# Altium PCB ADIO_Ver1.2.PcbDoc (part 1 of 2)
Units mm, origin at the board's own origin, x right, y up, seen from the top; angles counter-clockwise.
Board outline 260 x 90 mm, 2 copper layers (Top Layer, Bottom Layer); 178 components, 134 nets, 625 pads, 141 vias.
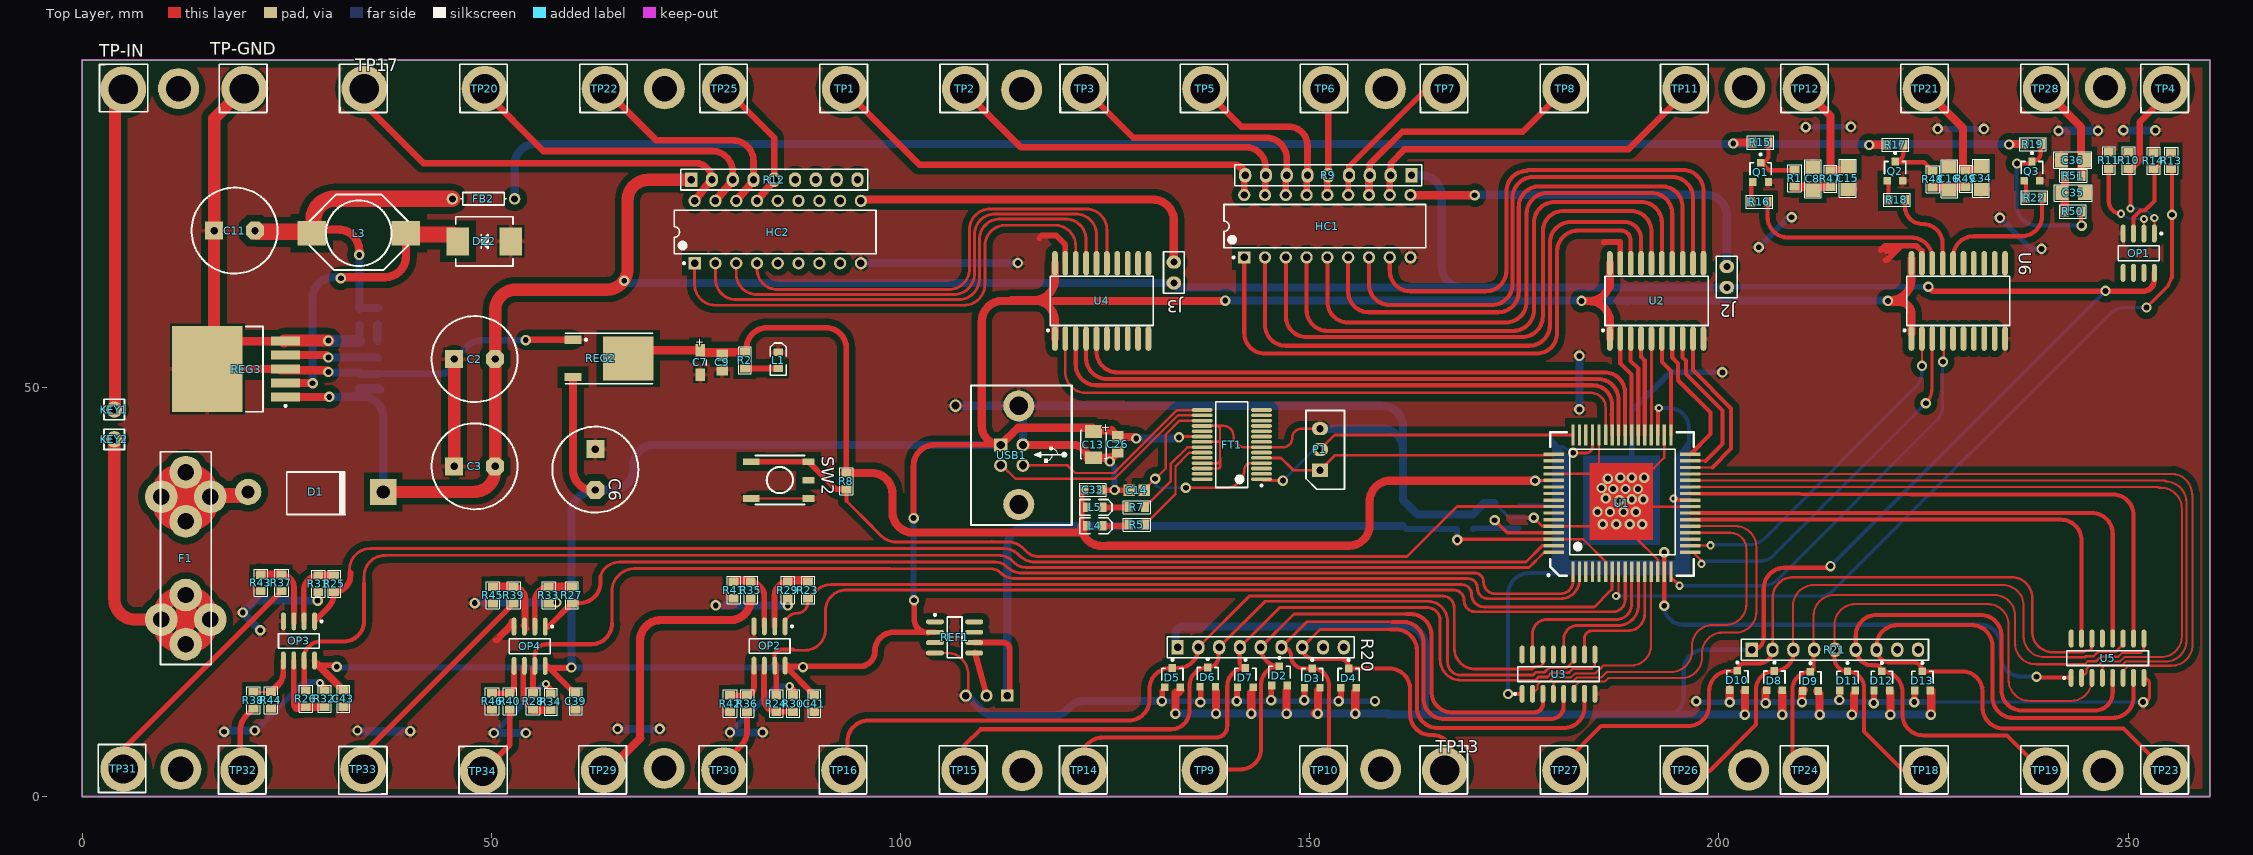
[diagram p0: Top Layer view]
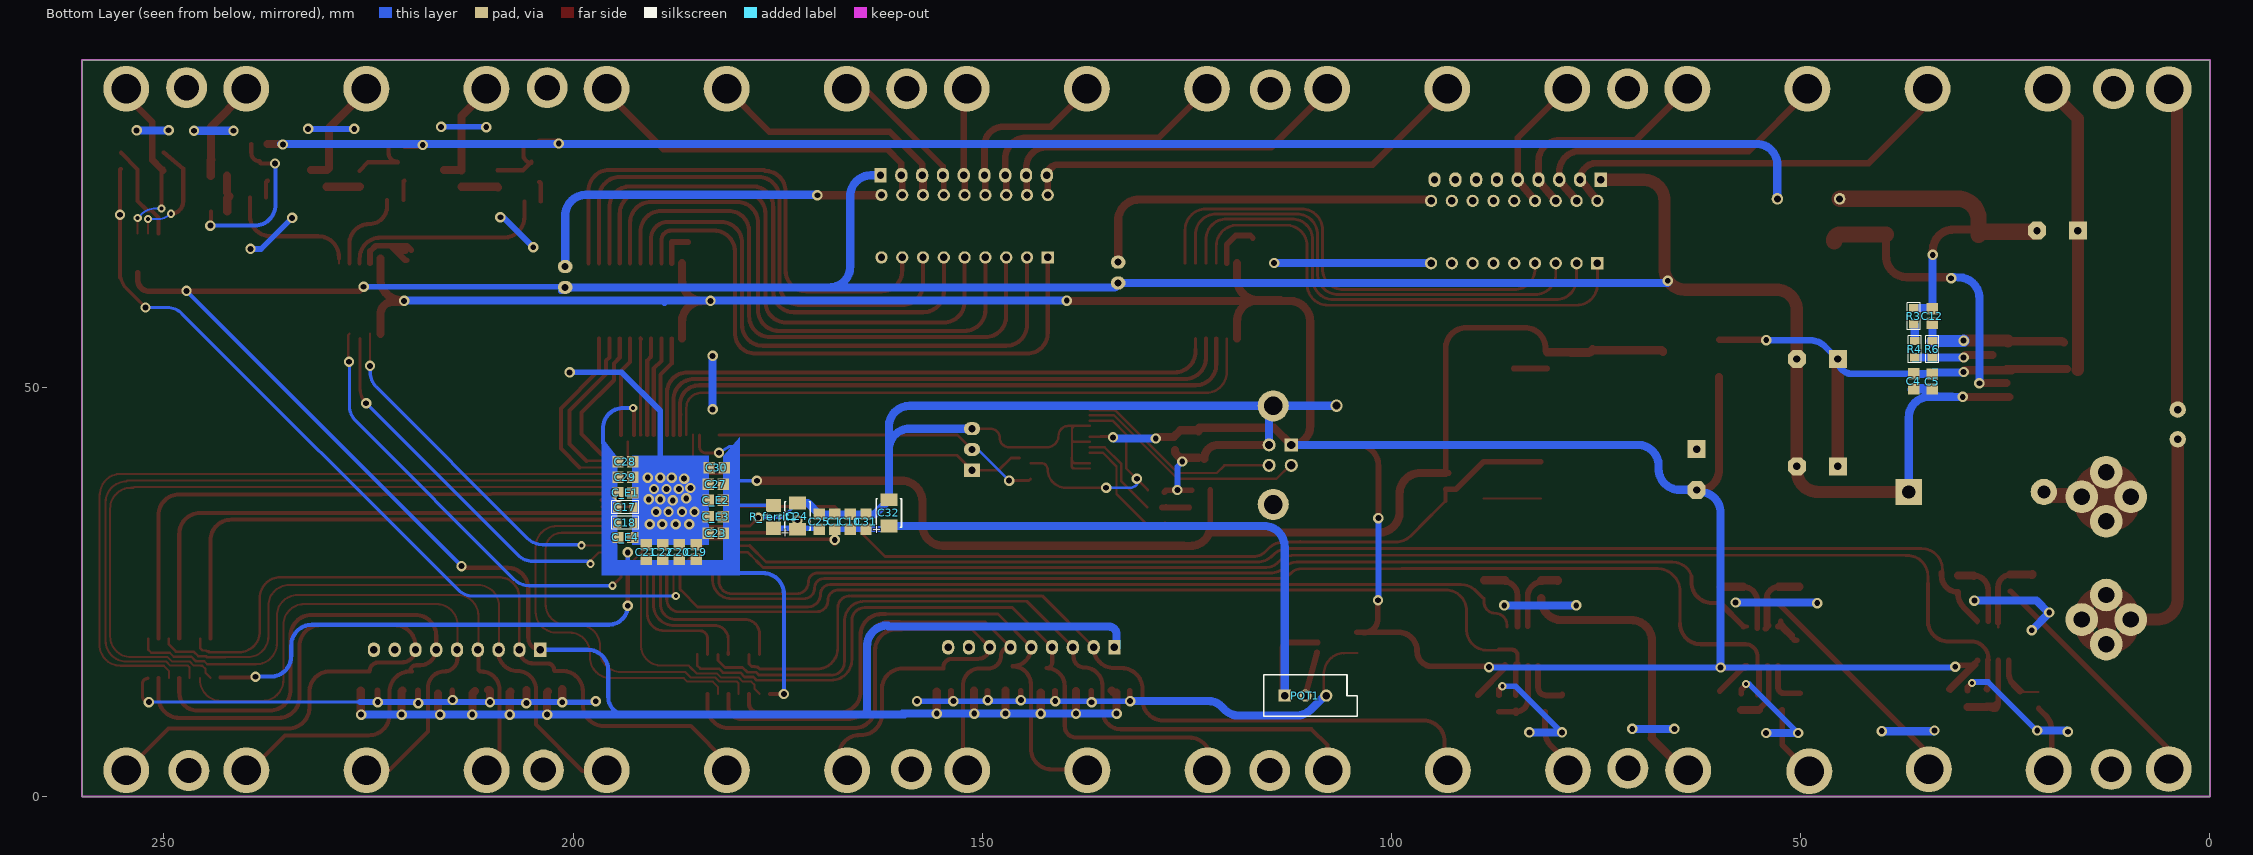
[diagram p1: Bottom Layer view, seen from below]
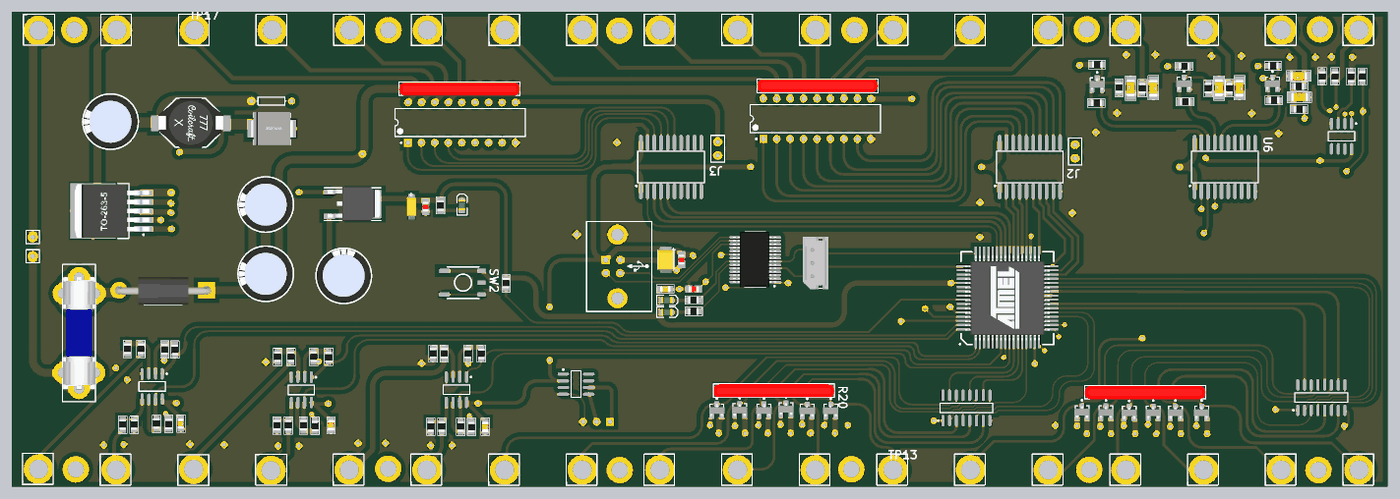
[diagram p3: 3D render of the assembled board from above, using the file's embedded part models]
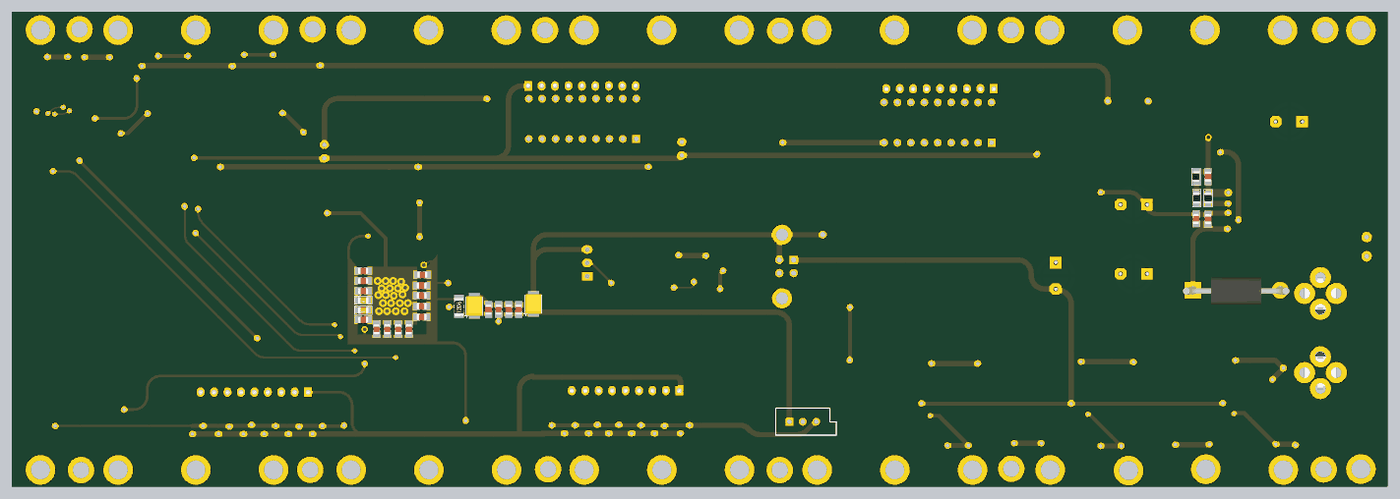
[diagram p4: 3D render of the assembled board from below, using the file's embedded part models]

## Layer stack, top to bottom
Top Layer: signal copper 0.0356
Dielectric: dielectric 0.32, FR-4, Dk 4.8
Bottom Layer: signal copper 0.0356

## Board outline
0,0 260,0 260,90 0,90

## Design rules (kind name [scope] priority, off if disabled: settings)
Clearance Clearance_1 [InPoly] p1: gap=0.8
Clearance [All] p2: gap=0.178
PolygonConnect [All] p1: connectstyle=Relief reliefconductorwidth=0.5 reliefentries=4 polygonreliefangle="90 Angle"
RoutingVias [All] p1: holewidth=0.711 width=1.27 viastyle="Through Hole" minholewidth=0.711 minwidth=1.27 maxholewidth=0.711 maxwidth=1.27
SilkscreenOverComponentPads SilkToSolderMaskClearance [IsPad] p1: minsilkscreentomaskgap=0.254
SolderMaskExpansion [All] p1: expansion=0.102
Width [All] p1: maxlimit=2.54 minlimit=0.254 preferedwidth=0.5
27 further rules are at their usual default settings.

## Components (designator, comment, footprint, x,y, rotation, side; value= is the part's Value field where it differs from the comment)
C1 "100nF" C805 168.022,33.593 r270 bottom
C2 "100uF" "CAP 5x10.5" 50.47,53.467 r0 top
C3 "100uF" "CAP 5x10.5" 50.47,40.361 r0 top
C4 "100nF" C805 36.203,50.749 r270 bottom
C5 "100nF" C805 33.909,50.724 r270 bottom
C6 "22uF" "CAP 5x10.5" 62.713,37.465 r270 top
C7 "2.2uF" CAPMOL-A 75.528,53.053 r270 top
C8 "100nF" C1206 211.455,75.489 r270 top
C9 "100nF" C805 78.195,53.053 r90 top
C10 "100nF" C805 166.117,33.593 r270 bottom
C11 "330uF" "CAP 5x10.5" 21.133,69.164 r0 top
C12 "100nF" C805 33.909,58.725 r90 bottom
C13 "47uF" CAPMOL-B 123.571,43.02 r270 top
C14 "1uF" C805 128.862,37.448 r0 top
C15 "100nF" C1206 215.773,75.565 r90 top
C16 "100nF" C1206 228.143,75.514 r270 top
C17 "100nF" C0805 193.618,35.349 r0 bottom
C18 "100nF" C0805 193.618,33.444 r0 bottom
C19 "2.2uF" C805 184.982,29.888 r270 bottom
C20 "100nF" C805 187.014,29.888 r270 bottom
C21 "100nF" C805 191.078,29.888 r270 bottom
C22 "100nF" C805 189.046,29.888 r270 bottom
C23 "100nF" C805 182.569,32.174 r180 bottom
C24 "10uF" CAPMOL-B 172.594,34.288 r90 bottom
C25 "100nF" C805 169.927,33.593 r270 bottom
C26 "100nF" C805 126.568,43.053 r90 top
C27 "100nF" C805 182.569,38.143 r180 bottom
C28 "100nF" C805 193.618,40.937 r0 bottom
C29 "100nF" C805 193.618,39.032 r0 bottom
C30 "100nF" C805 182.442,40.175 r180 bottom
C31 "100nF" C805 164.212,33.593 r270 bottom
C32 "4.7uF" CAPMOL-B 161.418,34.669 r90 bottom
C33 "100nF" C0805 123.494,37.49 r0 top
C34 "100nF" C1206 232.043,75.564 r90 top
C35 "100nF" C1206 243.307,73.802 r180 top
C36 "100nF" C1206 243.257,77.763 r0 top
C39 "100nF" C0805 60.3,11.684 r270 top
C41 "100nF" C0805 89.459,11.379 r270 top
C43 "100nF" C0805 31.928,11.989 r270 top
C_E1 "100nF" C805 193.618,37.127 r0 bottom
C_E2 "100nF" C805 182.569,36.238 r180 bottom
C_E3 "100nF" C805 182.569,34.206 r180 bottom
C_E4 "100nF" C805 193.618,31.666 r0 bottom
D1 "1N5400" MDO-201AD 20.295,37.236 r0 top
D2 "BAV99LT1" MSOT-23 146.304,14.757 r0 top
D3 "BAV99LT1" MSOT-23 150.317,14.478 r0 top
D4 "BAV99LT1" MSOT-23 154.762,14.478 r0 top
D5 "BAV99LT1" MSOT-23 133.223,14.529 r0 top
D6 "BAV99LT1" MSOT-23 137.541,14.605 r0 top
D7 "BAV99LT1" MSOT-23 142.138,14.529 r0 top
D8 "BAV99LT1" MSOT-23 206.781,14.173 r0 top
D9 "BAV99LT1" MSOT-23 211.176,14.097 r0 top
D10 "BAV99LT1" MSOT-23 202.26,14.199 r0 top
D11 "BAV99LT1" MSOT-23 215.718,14.136 r0 top
D12 "BAV99LT1" MSOT-23 219.909,14.136 r0 top
D13 "BAV99LT1" MSOT-23 224.862,14.136 r0 top
DZ2 "1N5822" DIODE-SMC 49.149,67.843 r180 top
F1 "FUSE" FUSE_3 12.675,24.638 r90 top
FB2 "Inductor" AXIAL-0.3 49.047,73.05 r0 top
FT1 "FT232RL" MSSOP-28 140.487,43.02 r270 top
HC1 "ULN2803" ULN2803 164.711,65.583 r90 top
HC2 "ULN2803" ULN2803 97.554,64.872 r90 top
J2 "Jumper" MRAD-0.1 200.965,64.77 r270 top
J3 "Jumper" MRAD-0.1 133.401,65.303 r270 top
KEY1 "VREF" Test-Pin 3.937,47.295 r90 top
KEY2 "VREF" Test-Pin 3.937,43.663 r90 top
L1 "LED BLUE" "LED 0805" 85.053,53.307 r0 top
L3 "100uH SMD SDR0503-101K" "Inductor SMD Power 100UH" 33.807,68.834 r180 top
L4 "LED BLUE" "LED 0805" 123.723,33.081 r270 top
L5 "LED BLUE" "LED 0805" 123.723,35.339 r270 top
OP1 "AD8572" SO8_N 251.3,66.401 r270 top
OP2 "AD8572" SO8_N 84.004,18.408 r270 top
OP3 "AD8572" SO8_N 26.5,19.025 r270 top
OP4 "AD8572" SO8_N 54.686,18.377 r270 top
P1 "Header 3 pin gerd" SPOX-3 151.257,39.878 r90 top
POT1 "RPot3" VR5 110.516,12.344 r180 bottom
Q1 "BC817-40" MSOT-23 205.105,76.276 r0 top
Q2 "BC817-40" MSOT-23 221.539,76.429 r0 top
Q3 "BC817-40" MSOT-23 238.252,76.429 r0 top
R1 "10K" R0805 209.245,75.54 r90 top
R2 "2.2K" R0805 80.989,53.307 r270 top
R3 "22K" R0805 36.195,58.725 r90 bottom
R4 "2.2K" R0805 36.068,54.661 r90 bottom
R5 "330R" R0805 128.862,33.246 r180 top
R6 "3.3" R0805 33.909,54.661 r90 bottom
R7 "330R" R0805 128.862,35.377 r180 top
R8 "3.3K" R0805 93.387,38.554 r90 top
R9 "Res_Array_8" RES_ARRAY8 152.273,75.921 r180 top
R10 "5K" R0805 250.055,77.73 r270 top
R11 "1K" R0805 247.642,77.73 r270 top
R12 "Res_Array_8" RES_ARRAY8 84.582,75.387 r0 top
R13 "1K" R0805 255.262,77.679 r90 top
R14 "5K" R0805 253.103,77.679 r270 top
R15 "1K" R0805 205.08,79.934 r0 top
R16 "1K" R0805 204.953,72.695 r0 top
R17 "1K" R0805 221.539,79.654 r0 top
R18 "1K" R0805 221.717,72.923 r0 top
R19 "1K" R0805 238.354,79.731 r0 top
R20 "Res_Array_8" RES_ARRAY8 144.018,18.248 r0 top
R21 "Res_Array_8" RES_ARRAY8 214.18,17.951 r0 top
R22 "1K" R0805 238.506,73.203 r0 top
R23 "1K" R0805 88.697,25.248 r270 top
R24 "1K" R0805 84.811,11.379 r90 top
R25 "1K" R0805 30.793,26.01 r270 top
R26 "1K" R0805 27.33,11.963 r90 top
R27 "1K" R0805 59.844,24.622 r270 top
R28 "1K" R0805 55.103,11.629 r90 top
R29 "10K" R0805 86.233,25.248 r90 top
R30 "10K" R0805 86.868,11.379 r270 top
R31 "10K" R0805 28.854,26.01 r90 top
R32 "10K" R0805 29.616,11.963 r270 top
R33 "10K" R0805 57.008,24.622 r90 top
R34 "10K" R0805 57.277,11.582 r270 top
R35 "10K" R0805 81.712,25.248 r90 top
R36 "10K" R0805 81.255,11.379 r90 top
R37 "10K" R0805 24.366,26.111 r90 top
R38 "10K" R0805 20.93,11.76 r90 top
R39 "10K" R0805 52.732,24.611 r90 top
R40 "10K" R0805 52.25,11.629 r90 top
R41 "1K" R0805 79.604,25.248 r90 top
R42 "1K" R0805 79.172,11.379 r90 top
R43 "1K" R0805 21.826,26.111 r90 top
R44 "1K" R0805 23.071,11.786 r90 top
R45 "1K" R0805 50.192,24.611 r90 top
R46 "1K" R0805 50.091,11.632 r90 top
R47 "10K" R0805 213.629,75.513 r270 top
R48 "10K" R0805 226.111,75.463 r90 top
R49 "10K" R0805 230.149,75.514 r270 top
R50 "10K" R0805 243.256,71.501 r0 top
R51 "10K" R0805 243.281,75.844 r180 top
R_ferrit1 "Res2" R1206 175.515,32.793 r180 bottom
REF1 "REF03GS" SO8_N 106.612,19.456 r0 top
REG2 "LD1117-33" MDPAK-TO-252 63.348,53.543 r270 top
REG3 "LM2576S-5.0" MTO-263 20.084,52.248 r180 top
SW2 "RESET" SW_SMD 85.259,38.681 r270 top
TP1 "TP_ADIO" test_point_ADIO 93.199,86.487 r90 top
TP2 "TP_ADIO" test_point_ADIO 107.872,86.487 r90 top
TP3 "TP_ADIO" test_point_ADIO 122.546,86.487 r90 top
TP4 "TP_ADIO" test_point_ADIO 254.61,86.487 r90 top
TP5 "TP_ADIO" test_point_ADIO 137.22,86.487 r90 top
TP6 "TP_ADIO" test_point_ADIO 151.893,86.487 r90 top
TP7 "TP_ADIO" test_point_ADIO 166.567,86.487 r90 top
TP8 "TP_ADIO" test_point_ADIO 181.241,86.487 r90 top
TP9 "TP_ADIO" test_point_ADIO 137.16,3.226 r90 top
TP10 "TP_ADIO" test_point_ADIO 151.841,3.226 r90 top
TP11 "TP_ADIO" test_point_ADIO 195.915,86.487 r90 top
TP12 "TP_ADIO" test_point_ADIO 210.588,86.487 r90 top
TP13 "TP_ADIO" test_point_ADIO 166.522,3.226 r90 top
TP14 "TP_ADIO" test_point_ADIO 122.479,3.226 r90 top (schematic designator TP24)
TP15 "TP_ADIO" test_point_ADIO 107.798,3.226 r90 top (schematic designator TP27)
TP16 "TP_ADIO" test_point_ADIO 93.116,3.226 r90 top
TP17 "TP_ADIO" test_point_ADIO 34.504,86.487 r90 top
TP18 "TP_ADIO" test_point_ADIO 225.247,3.226 r90 top
TP19 "TP_ADIO" test_point_ADIO 239.928,3.226 r90 top
TP20 "TP_ADIO" test_point_ADIO 49.177,86.487 r90 top
TP21 "TP_ADIO" test_point_ADIO 225.262,86.487 r90 top
TP22 "TP_ADIO" test_point_ADIO 63.851,86.487 r90 top
TP23 "TP_ADIO" test_point_ADIO 254.61,3.226 r90 top
TP24 "TP_ADIO" test_point_ADIO 210.566,3.226 r90 top
TP25 "TP_ADIO" test_point_ADIO 78.525,86.487 r90 top
TP26 "TP_ADIO" test_point_ADIO 195.885,3.226 r90 top
TP27 "TP_ADIO" test_point_ADIO 181.204,3.226 r90 top
TP28 "TP_ADIO" test_point_ADIO 239.936,86.487 r90 top
TP29 "TP_ADIO" test_point_ADIO 63.754,3.226 r90 top
TP30 "TP_ADIO" test_point_ADIO 78.435,3.226 r90 top
TP31 "TP_ADIO" test_point_ADIO 5.029,3.378 r90 top
TP32 "TP_ADIO" test_point_ADIO 19.71,3.226 r90 top
TP33 "TP_ADIO" test_point_ADIO 34.339,3.353 r180 top
TP34 "TP_ADIO" test_point_ADIO 48.946,3.105 r0 top
TP-GND "TP_ADIO" test_point_ADIO 19.83,86.487 r90 top
TP-IN "TP_ADIO" test_point_ADIO 5.029,86.435 r0 top
U1 "ATxmega64" MTQFP64 188.157,35.857 r180 top
U2 "74HC245" D020_N 186.682,56.972 r270 top
U3 "MC74HC4050D" 751B-05_N 180.403,14.963 r90 top
U4 "74HC245" D020_N 118.872,56.972 r270 top
U5 "MC74HC4050D" 751B-05_N 247.49,16.916 r90 top
U6 "74HC245" D020_N 223.538,56.972 r270 top
USB1 "USB Series B (Printer Type)" USB-B 114.452,47.752 r90 top

## Footprints (in the part's own frame and the unit in brackets; to place one, negate y for a bottom-side part, rotate by r counter-clockwise, add the part's x,y. Pads: shape width x height; smd on the part's side, far side on the other; paste and mask are expansions set on the pad)
751B-05_N [mm] "SOIC, 16-Leads, Body 9.9x3.9mm, Pitch 1.27mm, IPC Medium Density"
  oval 2.2x0.6 smd: 1(-2.4,4.445) 2(-2.4,3.175) 3(-2.4,1.905) 4(-2.4,0.635) 5(-2.4,-0.635) 6(-2.4,-1.905) 7(-2.4,-3.175) 8(-2.4,-4.445) 9(2.4,-4.445) 10(2.4,-3.175) 11(2.4,-1.905) 12(2.4,-0.635) 13(2.4,0.635) 14(2.4,1.905) 15(2.4,3.175) 16(2.4,4.445)
  silkscreen extent -2.52,-5 0.9,5.42, body extent -2,-5 2,5, height 1.75
AXIAL-0.3 [mm] "Axial Device, Thru-Hole; 2 Leads; 0.3 in Pin Spacing"
  round 1.4 hole 0.85: 1(-3.81,0) 2(3.81,0)
  silkscreen extent -2.77,-0.76 2.77,0.76
C805 [mm]
  rect 1.4x1.4 smd: 1(-0.9,0) 2(0.9,0)
  body extent -0.99,-0.62 1.01,0.64, height 0.78
C0805 [mm]
  rect 1x1.2 smd: 1(-1,0) 2(1,0)
  silkscreen extent -1.65,-0.8 1.65,0.8, body extent -1,-0.62 1,0.63, height 0.78
C1206 [mm]
  rect 1.6x1.8 smd: 1(-1.4,0) 2(1.4,0)
  silkscreen extent -2.34,-0.99 2.31,1.04, body extent -1.68,-0.79 1.52,0.81, height 1
"CAP 5x10.5" [mm]
  oct 2.2x2.2 hole 0.9: 1(0,0)
  rect 2.2x2.2 hole 0.9: 2(-5,0)
  silkscreen extent -7.75,-5.25 2.75,5.25, body extent -7.6,-5.08 2.52,5.04, height 12.7
CAPMOL-A [mm]
  rect 1.5x1.2 smd: 1(-1.5,0) 2(1.5,0)
  silkscreen extent -0.35,-0.75 0.35,0.75, body extent -2.4,-0.9 2.4,0.9, height 1.8
CAPMOL-B [mm]
  rect 1.55x2.05 smd: 1(-1.6,0) 2(1.6,0)
  silkscreen extent -1.75,-1.55 1.75,1.55, body extent -2.52,-1.5 2.48,1.5, height 2.11
D020_N [mm] "SOIC, 14-Leads, Body 8.7x3.9mm, Pitch 1.27mm, IPC Medium Density"
  oval 3x0.7 smd: 1(1,0) 2(1,1.27) 3(1,2.54) 4(1,3.81) 5(1,5.08) 6(1,6.35) 7(1,7.62) 8(1,8.89) 9(1,10.16) 10(1,11.43) 11(-8.2,11.43) 12(-8.2,10.16) 13(-8.2,8.89) 14(-8.2,7.62) 15(-8.2,6.35) 16(-8.2,5.08) 17(-8.2,3.81) 18(-8.2,2.54) 19(-8.2,1.27) 20(-8.2,0)
  silkscreen extent -6.6,-0.97 0.12,12.02, body extent -7.88,-0.46 1.12,12.06, height 1.75
DIODE-SMC [mm]
  rect 2.75x3.4 smd: 1(-3.225,0) 2(3.225,0)
  silkscreen extent -3.5,-3 3.5,3, body extent -4.06,-3.15 4.06,3.15, height 2.67
FUSE_3 [mm] "Fuse 3A"
  round 4 hole 2: 1(-6,0) 1(-3,3) 1(-3,-3) 1(0,0) 2(9,0) 2(12,-3) 2(12,3) 2(15,0)
  silkscreen extent -8.5,-3.1 17.5,3.1, body extent -6.14,-3.12 15.14,3.07, height 9.59
"Inductor SMD Power 100UH" [mm]
  rect 3.5x3 smd: 1(-5.75,0) 2(5.75,0)
  silkscreen extent -6,-4.75 6,4.5, body extent -6.22,-4.77 6.22,4.63, height 2.69
"LED 0805" [mm]
  rect 1.15x0.9 smd: 1(0,-0.98) 2(0,0.98)
  silkscreen extent -0.98,-1.83 0.98,2.13, body extent -0.64,-0.95 0.64,1.08, height 1.1
MDO-201AD [mm]
  round 3.2 hole 1.6: 1(0,0)
  rect 3.2x3.2 hole 1.6: 2(16.5,0)
  silkscreen extent 4.71,-2.83 11.92,2.51, body extent -1.77,-2.78 18.39,2.52, height 2.65
MDPAK-TO-252 [mm]
  rect 1x2.1 smd: 1(-2.285,-3.375) 3(2.285,-3.375)
  rect 5.4x6.2 smd: 4(0,3.375)
  silkscreen extent -3.09,-4.32 3.09,6.38, body extent -3.37,-3.7 3.18,6.24, height 2.14
MRAD-0.1 [mm]
  oval 1.6x1.8 hole 0.85: 1(0,0) 2(2.54,0)
  silkscreen extent -1.27,-1.27 3.81,1.27
MSOT-23 [mm]
  rect 0.9x0.95 smd: 1(-0.95,-1.175) 2(0.95,-1.175) 3(0,1.175)
  silkscreen extent -1.3,-0.3 1.3,2.32, body extent -1.45,-1.27 1.45,1.15, height 0.98
MSSOP-28 [mm]
  oval 0.45x2.55 smd: 1(4.225,3.625) 2(3.575,3.625) 3(2.925,3.625) 4(2.275,3.625) 5(1.625,3.625) 6(0.975,3.625) 7(0.325,3.625) 8(-0.325,3.625) 9(-0.975,3.625) 10(-1.625,3.625) 11(-2.275,3.625) 12(-2.925,3.625) 13(-3.575,3.625) 14(-4.225,3.625) 15(-4.225,-3.625) 16(-3.575,-3.625) 17(-2.925,-3.625) 18(-2.275,-3.625) 19(-1.625,-3.625) 20(-0.975,-3.625) 21(-0.325,-3.625) 22(0.325,-3.625) 23(0.975,-3.625) 24(1.625,-3.625) 25(2.275,-3.625) 26(2.925,-3.625) 27(3.575,-3.625) 28(4.225,-3.625)
  silkscreen extent -5.25,-1.95 5.25,3.75, body extent -5.28,-4.21 5.22,4.01, height 1.92
MTO-263 [mm]
  rect 3.5x1.1 smd: 1(-4.775,3.4) 2(-4.775,1.7) 3(-4.775,0) 4(-4.775,-1.7) 5(-4.775,-3.4)
  rect 8.6x10.5 smd: 6(4.775,0)
  silkscreen extent -4.9,-5.2 0.07,5.2, body extent -5.84,-5.08 8.17,5.08, height 4.56
MTQFP64 [mm]
  rect 0.406x2.54 smd: 1(5.982,8.366) 2(5.194,8.366) 3(4.407,8.366) 4(3.594,8.366) 5(2.807,8.366) 6(1.994,8.366) 7(1.206,8.366) 8(0.419,8.366) 9(-0.394,8.366) 10(-1.181,8.366) 11(-1.994,8.366) 12(-2.781,8.366) 13(-3.569,8.366) 14(-4.382,8.366) 15(-5.169,8.366) 16(-5.982,8.366) 33(-5.982,-8.348) 34(-5.169,-8.348) 35(-4.382,-8.348) 36(-3.569,-8.348) 37(-2.781,-8.348) 38(-1.994,-8.348) 39(-1.181,-8.348) 40(-0.394,-8.348) 41(0.419,-8.348) 42(1.206,-8.348) 43(2,-8.366) 44(2.807,-8.348) 45(3.594,-8.348) 46(4.407,-8.348) 47(5.194,-8.348) 48(5.982,-8.348)
  rect 2.54x0.406 smd: 17(-8.344,6.003) 18(-8.344,5.191) 19(-8.344,4.403) 20(-8.344,3.616) 21(-8.344,2.803) 22(-8.344,2.016) 23(-8.344,1.203) 24(-8.344,0.415) 25(-8.344,-0.372) 26(-8.344,-1.185) 27(-8.344,-1.972) 28(-8.344,-2.785) 29(-8.344,-3.572) 30(-8.344,-4.36) 31(-8.344,-5.173) 32(-8.344,-5.96) 49(8.344,-5.96) 50(8.344,-5.173) 51(8.344,-4.36) 52(8.344,-3.572) 53(8.344,-2.785) 54(8.344,-1.972) 55(8.344,-1.185) 56(8.344,-0.372) 57(8.344,0.415) 58(8.344,1.203) 59(8.344,2.016) 60(8.344,2.803) 61(8.344,3.616) 62(8.344,4.403) 63(8.344,5.191) 64(8.344,6.003)
  silkscreen extent -8.75,-8.65 9.1,8.92, body extent -8,-7.9 8,8.1, height 1
R0805 [mm]
  rect 1x1.2 smd: 1(-1,0) 2(1,0)
  silkscreen extent -1.65,-0.8 1.65,0.8, body extent -0.95,-0.61 1.05,0.64, height 0.5
R1206 [mm]
  rect 1.8x1.6 smd: 1(0,0) 2(0,2.8)
  silkscreen extent -0.8,1.1 0.8,1.7, body extent -0.87,-0.41 0.86,2.95, height 0.85
RES_ARRAY8 [mm]
  rect 1.5x1.8 hole 0.9: 1(-10.16,0)
  oval 1.5x1.8 hole 0.9: 2(-7.62,0) 3(-5.08,0) 4(-2.54,0) 5(0,0) 6(2.54,0) 7(5.08,0) 8(7.62,0) 9(10.16,0)
  silkscreen extent -11.43,-1.27 11.43,1.27, body extent -11.4,-1.31 11.41,1.19, height 6.43
SO8_N [mm] "SOIC, 8-Leads, Body 4.9x3.9mm, Pitch 1.27mm, IPC Medium Density"
  oval 2.2x0.6 smd: 1(-2.4,1.905) 2(-2.4,0.635) 3(-2.4,-0.635) 4(-2.4,-1.905) 5(2.4,-1.905) 6(2.4,-0.635) 7(2.4,0.635) 8(2.4,1.905)
  silkscreen extent -2.52,-2.5 0.9,2.88, body extent -1.95,-2.45 1.95,2.45, height 1.75
SPOX-3 [mm]
  rect 1.6x2 hole 0.9: 1(0,0)
  oval 1.6x2 hole 0.9: 2(2.54,0) 3(5.08,0)
  silkscreen extent -2.3,-3 7.3,1.7, body extent -2.45,-3.1 7.45,1.8, height 5.95
SW_SMD [mm] "SWITCH SMD"
  rect 0.8x1.5 smd: 1(-2.25,3.5) 2(2.25,3.5) 5(0,3.5)
  rect 0.8x2 smd: 3(-2.25,-3.5) 4(2.25,-3.5)
  silkscreen extent -3,-3 3,3, body extent -3,-4 3,4, height 2.5
Test-Pin [mm]
  round 2 hole 0.9: 1(0,0)
  silkscreen extent -1.25,-1.25 1.25,1.25, body extent -0.5,-0.5 0.5,0.5, height 6.5
test_point_ADIO [mm]
  round 5.6 hole 3.6: 1(0,0)
  silkscreen extent -2.9,-2.77 3,3.05, body extent -2.72,-2.67 2.96,3.02, height 6.5
ULN2803 [mm] "ULN2803"
  rect 1.5x1.5 hole 0.9: 1(0.305,22.708)
  round 1.5 hole 0.9: 2(0.305,20.168) 3(0.305,17.628) 4(0.305,15.088) 5(0.305,12.548) 6(0.305,10.008) 7(0.305,7.468) 8(0.305,4.928) 9(0.305,2.388) 10(7.925,2.388) 11(7.925,4.928) 12(7.925,7.468) 13(7.925,10.008) 14(7.925,12.548) 15(7.925,15.088) 16(7.925,17.628) 17(7.925,20.168) 18(7.925,22.708)
  silkscreen extent 0.18,0.51 6.76,25.19, body extent 0.43,0.53 7.75,25.19, height 5.08
USB-B [mm]
  rect 1.6x1.6 hole 1: 1(-4.77,2.205)
  round 1.6 hole 1: 2(-7.27,2.205) 3(-7.27,-0.505) 4(-4.77,-0.505)
  round 3.8 hole 2.3: 5(0,0) 6(-12.04,0)
  silkscreen extent -14.54,-6.48 2.5,5.84
VR5 [mm] "Variable Resistor, Thru-Hole; 3 Leads"
  rect 1.5x1.5 hole 0.9: 1(-2.54,0)
  round 1.5 hole 0.9: 2(0,0) 3(2.54,0)
  silkscreen extent -5.08,-2.54 6.35,2.54

## Part data
C1 C4 C5 C9 C10 C12 C14 C19 C20 C21 C22 C23 C25 C26 C27 C28 C29 C30 C31 C33 C_E1 C_E2 C_E3 C_E4: library part "CAP NONPOLAR"
C2 C3 C6 C7 C11 C13 C24 C32: library part "CAP BIPOLAR"
C8 C15 C16 C34 C35 C36: library part Cap_1206, "Capacitor"
C17 C18 C39 C41 C43: library part Cap_0805, "Capacitor"
D1: library part DIODE
D2 D3 D4 D5 D6 D7 D8 D9 D10 D11 D12 D13: "DATA LINE PROTECTOR"
DZ2: library part "Diode Zener"
F1: "FUSE 3A"
FT1: "FT232RL -- USB UART IC"
KEY1 KEY2: library part "Test Point", "No PCB Compunent need"
L1 L4 L5: library part LED
L3: library part Inductor, "SMD Power Inductor 100UH"
OP1 OP2 OP3 OP4: library part LM358D, "Zero-Drift, Single-Supply, Rail-to-Rail"
P1: library part "Header 3", "Header, 3-Pin"
POT1: library part RPot, "Potentiometer"
Q1 Q2 Q3: "NPN General Purpose Amplifier"
R1 R8 R10 R11 R13 R14 R23 R24 R25 R26 R27 R28 R29 R30 R31 R32 R33 R34 R35 R36 R37 R38 R39 R40 R41 R42 R43 R44 R45 R46 R47 R48 R49 R50 R51: library part Res_0805, "Resistor"
R2 R3 R4 R5 R6 R7 R15 R16 R17 R18 R19 R22: library part RES
R_ferrit1: "Resistor"
REF1: "+2.5V Precision Voltage Reference"
REG3: "SIMPLE SWITCHER® 3A Step-Down Voltage Regulator, 5-pin TO-263"
SW2: library part SW-PB-4Pin, "Thin surface mounted micro switch"
TP1 TP2 TP3 TP4 TP5 TP6 TP7 TP8 TP9 TP10 TP11 TP12 TP13 TP14 TP15 TP16 TP17 TP18 TP19 TP20 TP21 TP22 TP23 TP24 TP25 TP26 TP27 TP28 TP29 TP30 TP31 TP32 TP33 TP34 TP-GND TP-IN: library part TEST_POINT_ADIO
U1: "Low power, high performance 8/16-bit AVR microcontroller"
U2 U4 U6: "Octal Inverting Tri-State Buffer"
U3 U5: "Hex Non-Inverting Buffer/Logic-Level Down Converter"
USB1: library part USB-B, "USB B type Socket"

## Free pads (board coordinates)
  round 5 hole 3.1: 1(11.786,86.512) 1(12.065,3.327) 1(71.11,3.447) 1(71.161,86.48) 1(114.798,86.378) 1(114.875,3.193) 1(158.664,3.346) 1(159.248,86.48) 1(203.165,86.632) 1(203.632,3.251) 1(246.955,3.193) 1(247.234,86.632)

## Via types
v1: diameter 1.27, hole 0.711, Top Layer to Bottom Layer, 127 vias
v2: diameter 1, hole 0.5, Top Layer to Bottom Layer, 13 vias
v3: diameter 1.5, hole 1, Top Layer to Bottom Layer, 1 vias

## Nets (pads, with @x,y where several pads share a name; then routed paths per layer and width w, separated by ;. In a path a pad name is that pad's centre, name@x,y a point inside that pad or via, vN(x,y) a via of type N, cw(c..) or ccw(c..) an arc to the next point about the centre after c; other vN are vias at no path point)
+2.5V: C1.2 C10.2 C31.2 C32.1 POT1.1 REF1.6 U1.6 U1.62 | length 108.1
  Top Layer w0.3: U1.62@179.813,31.454 183.431,31.454 186.163,28.722 U1.6@186.163,27.491
  Top Layer w0.4: v1@168.489,31.453 178.273,31.453 ; 177.42,31.454 U1.62@179.813,31.454
  Top Layer w0.7: REF1.6@109.012,18.821 112.594,18.821 cw(c112.594,18.072) 113.343,18.072 POT1.1@113.343,12.344 ; v1@168.022,30.986 v1@168.489,31.453
  Bottom Layer w0.7: C32.1@161.418,33.069 161.793,32.693 C31.2@164.212,32.693 C10.2@166.117,32.693 C1.2@168.022,32.693 v1(168.022,31.367)
  Bottom Layer w1: POT1.1@113.056,12.344 113.056,30.529 cw(c115.596,30.529) 115.596,33.069 C32.1@161.418,33.069
+3.3V: C7.1 C9.2 C17.2 C18.2 C19.2 C20.2 C21.2 C22.2 C23.2 C27.2 C28.2 C29.2 C30.2 C33.1 C_E1.2 C_E2.2 C_E3.2 C_E4.2 L4.1 L5.1 R2.1 R8.2 R_ferrit1.2 REG2.4 U1.15 U1.25 U1.35 U1.45 U1.53 U3.1 U5.1 | length 266.1
  Top Layer w0.254: v1@193.295,30.224 193.326,30.193 v1(193.326,29.843)
  Top Layer w0.3: v2@192.539,47.48 v2@192.71,47.65
  Top Layer w0.35: v1@181.915,42.012 ccw(c181.94,42.012) 181.94,41.986 183.769,41.986 ccw(c183.769,42.78) 184.563,42.78 U1.45@184.563,44.205
  Top Layer w0.4: v1(177.547,38.606) 177.582,38.642 U1.53@179.813,38.642
  Top Layer w0.5: v1(174.244,12.548) 174.244,12.563 U3.1@175.959,12.563 ; U1.35@192.539,44.205 v2@192.539,47.48 ; v1@193.326,23.698 U1.15@193.326,27.491 v1(193.326,29.843) ; v2(194.438,36.447) 194.656,36.229 U1.25@196.501,36.229 ; v1(238.811,14.656) cw(c238.811,14.58) 238.887,14.58 243.053,14.58 cw(c243.053,14.554) U5.1@243.078,14.554
  Top Layer w0.7: 77.085,54.323 75.758,54.323 C7.1@75.528,54.553 ccw(c76.03,54.553) 75.552,54.4 ccw(c76.03,54.553) 76.03,54.051 C9.2@78.13,54.051 ; R2.1@81.178,54.458 81.178,54.762 cw(c83.718,54.762) 83.718,57.302 90.847,57.302 cw(c90.847,54.762) 93.387,54.762 R8.2@93.387,39.554 R8.2@93.022,39.554 ; 122.143,32.799 122.143,33.061 ; C33.1@122.143,37.478 122.143,33.061 ; 122.163,33.081 122.143,33.061
  Top Layer w1: REG2.4@66.827,54.331 cw(c67.049,54.331) 67.049,54.553 C7.1@75.455,54.553 ; C7.1@75.438,54.661 ccw(c75.792,54.661) C7.1@75.455,54.553 ; C7.1@75.528,54.553 C7.1@75.455,54.553 ; R2.1@80.989,54.307 75.792,54.307 cw(c75.792,54.661) 75.552,54.4 cw(c75.792,54.661) C7.1@75.455,54.553 ; R8.2@93.387,39.554 96.469,39.554 cw(c96.469,37.014) 99.009,37.014 99.009,34.798 ccw(c101.549,34.798) 101.549,32.258 121.514,32.258 ccw(c121.514,32.918) 122.16,32.781 ; 122.143,33.061 ccw(c124.572,33.061) 122.16,32.781 ; 122.174,32.918 cw(c121.514,32.918) 122.16,32.781 ; v1@177.546,38.608 159.868,38.608 ccw(c159.868,36.068) 157.328,36.068 157.328,33.198 cw(c154.788,33.198) 154.788,30.658 125.4,30.658 ccw(c125.4,30.632) 125.374,30.632 124.572,30.632 cw(c124.572,33.061) 122.16,32.781
  Bottom Layer w0.35: 180.214,42.772 180.95,42.774 v1(182.169,42.012)
  Bottom Layer w0.4: R_ferrit1.2@175.515,35.593 180.762,35.593 180.918,35.438 ; v1(177.547,38.606) 180.214,38.606
  Bottom Layer w0.5: v1(174.244,12.548) 174.244,24.765 cw(c176.784,24.765) 176.784,27.305 180.111,27.305 ; v2(192.659,47.498) 193.827,47.498 cw(c193.827,44.958) 196.367,44.958 196.367,43.205 ; v1(193.319,23.317) ccw(c195.631,23.317) 195.631,21.006 231.902,21.006 cw(c231.902,18.466) 234.442,18.466 234.442,17.196 ccw(c236.982,17.196) 236.982,14.656 v1(238.811,14.656) ; 193.326,28.192 v1(193.326,29.843)
+24V: C2.1 C3.1 C4.2 C5.2 D1.2 D2.2 D3.2 D4.2 D5.2 D6.2 D7.2 D8.2 D9.2 D10.2 D11.2 D12.2 D13.2 J2.2 J3.2 OP1.8 R9.1 R12.1 R20.1 R21.1 REG3.1 | length 560
  Top Layer w0.5: R21.1@204.02,17.951 ccw(c204.02,19.417) 205.486,19.417 205.486,25.425 cw(c208.026,25.425) 208.026,27.965 213.36,27.965 ccw(c213.36,28.143) v1@213.538,28.143
  Top Layer w0.7: v1(225.603,62.306) 226.136,61.747 251.79,61.747 ccw(c251.79,63.162) 253.205,63.162 OP1.8@253.205,64.001
  Top Layer w1: REG3.1@24.511,48.844 v1(30.201,48.844) ; v1(133.596,10.146) 133.596,12.719 ; 133.952,12.719 D5.2@134.187,12.954 ; v1(138.549,10.146) 138.549,12.923 ; v1(142.867,10.146) 142.867,12.724 ; 147.168,12.954 147.168,10.163 v1(147.185,10.146) ; v1@150.614,10.146 151.026,10.558 D3.2@151.026,12.954 ; v1(155.567,10.146) D4.2@155.567,12.858 ; D10.2@203.079,12.834 203.175,12.738 v1(203.175,10.026) ; D8.2@207.651,12.834 207.747,12.738 v1(207.747,10.026) ; D9.2@211.999,12.915 212.302,12.612 212.302,10.043 v1(212.319,10.026) ; v1(216.256,10.026) 216.51,10.28 D11.2@216.51,12.611 ; D12.2@220.859,12.961 220.955,12.865 v1(220.955,10.026) ; v1@225.838,10.284 225.939,10.311 D13.2@225.939,12.961
  Top Layer w1.5: D1.2@36.795,37.236 47.904,37.236 ccw(c47.904,39.776) 50.444,39.776 C3.1@50.444,40.335 ; C2.1@50.444,53.543 cw(c50.444,53.518) C2.1@50.47,53.518 ; C3.1@50.47,40.361 C2.1@50.47,53.467 C2.1@50.47,53.518 ; R12.1@74.371,75.362 69.19,75.362 ccw(c69.19,72.822) 66.65,72.822 66.65,64.491 cw(c64.11,64.491) 64.11,61.951 53.01,61.951 ccw(c53.01,59.411) 50.47,59.411 C2.1@50.47,53.518
  Bottom Layer w0.5: 159.41,10.109 ccw(c159.493,10.109) 159.493,10.026 ; 193.548,10.008 ccw(c193.548,12.167) 193.832,10.026 ccw(c193.548,12.167) 195.707,12.167 195.707,15.411 cw(c198.247,15.411) 198.247,17.951 R21.1@204.02,17.951 ; v1(213.639,28.169) 247.11,61.64 cw(c247.371,61.379) v1@247.371,61.747
  Bottom Layer w0.7: J2.2@201.016,62.255 ccw(c201.524,62.255) J2.2@201.524,61.747 ; J2.2@201.549,62.306 v1(225.603,62.306)
  Bottom Layer w1: v1(30.201,48.844) 32.929,48.844 ccw(c32.929,49.824) 33.151,48.87 ; 31.521,48.87 33.151,48.87 ; C5.2@33.884,49.936 36.115,49.936 cw(c36.115,49.849) C4.2@36.203,49.849 ; C4.2@36.424,49.759 33.974,49.759 cw(c33.974,49.824) C5.2@33.909,49.824 cw(c32.929,49.824) 33.151,48.87 ; D1.2@36.795,37.236 36.795,46.33 ccw(c34.255,46.33) 34.255,48.87 33.151,48.87 ; v1@66.218,62.916 ccw(c66.37,62.916) 66.37,62.763 J3.2@133.378,62.763 ; J3.2@133.375,62.814 ccw(c133.96,62.814) J3.2@133.378,62.763 ; J3.2@133.401,62.763 J3.2@133.378,62.763 ; v1(133.596,10.146) v1(138.549,10.146) v1(142.867,10.146) v1(147.185,10.146) v1(150.995,10.146) v1(155.567,10.146) 159.758,10.146 ; R20.1@133.604,18.136 133.604,19.863 cw(c134.518,19.863) 134.518,20.777 161.392,20.777 ccw(c161.392,20.853) 161.468,20.853 ccw(c161.468,20.93) 161.544,20.93 cw(c161.544,18.39) 164.084,18.39 164.084,10.026 ; 159.493,10.026 164.084,10.026 ; R9.1@162.331,75.921 163.601,75.921 cw(c163.601,73.381) 166.141,73.381 166.141,64.77 ccw(c168.681,64.77) 168.681,62.23 ; J2.2@200.965,62.23 168.681,62.23 ; v1@225.273,10.026 v1(220.955,10.026) v1(216.256,10.026) v1(212.319,10.026) v1(207.747,10.026) v1(203.175,10.026) 193.832,10.026 164.084,10.026 ; J3.2@133.378,62.763 ccw(c133.96,62.814) 133.96,62.23 168.681,62.23
  other v1: 225.908,10.026 247.244,61.798 66.243,63.043
ADC-A1: OP3.1 R25.2 U1.63 | length 162.9
  Top Layer w0.3: OP3.1@28.405,21.182 OP3.1@28.405,21.425 ; 178.41,30.666 U1.63@179.813,30.666
  Top Layer w0.35: R25.2@30.734,24.968 ccw(c30.734,26.924) 30.793,24.969 ccw(c30.734,26.924) 31.766,25.263 ccw(c30.734,26.924) 32.647,26.518 ; 32.563,26.416 ccw(c32.072,26.907) 32.647,26.518 ; 32.791,27.356 ccw(c34.606,27.051) 32.766,27.051 32.766,26.907 cw(c32.072,26.907) 32.647,26.518 ; 178.41,30.666 176.42,28.677 117.348,28.677 116.368,28.677 cw(c116.368,31.217) 114.572,29.421 114.434,29.558 ccw(c112.638,27.762) 112.638,30.302 35.23,30.302 ccw(c35.23,27.762) 32.69,27.762 32.69,26.924 cw(c30.734,26.924) 32.647,26.518
  Top Layer w0.7: OP3.1@28.423,21.463 30.049,23.089 ccw(c28.253,24.885) 30.793,24.885 30.793,24.969 R25.2@30.793,25.01 ccw(c30.793,27.008) 31.766,25.263 ccw(c30.793,27.008) 32.791,27.008 32.791,27.356
ADC-A2: OP3.7 R26.2 U1.64 | length 168.3
  Top Layer w0.3: OP3.7@27.135,16.544 OP3.7@27.135,16.625 ; 177.62,28.827 178.647,29.854 U1.64@179.813,29.854
  Top Layer w0.35: 34.468,26.06 34.468,26.939 cw(c37.008,26.939) 35.197,28.72 ; 35.509,29.032 35.212,28.735 ; 177.62,28.827 176.809,28.016 116.205,28.016 115.304,28.016 cw(c115.304,30.011) 113.894,28.6 113.749,28.745 ccw(c111.952,26.949) 111.952,29.489 37.196,29.489 ccw(c37.196,29.403) 37.135,29.464 36.993,29.464 ccw(c36.993,26.924) 35.212,28.735 ; 35.197,28.72 cw(c36.993,26.924) 35.204,28.727 ; 35.197,28.72 cw(c37.008,26.939) 35.204,28.727 ; 35.204,28.727 cw(c36.993,26.924) 35.212,28.735 ; 35.204,28.727 cw(c37.008,26.939) 35.212,28.735
  Top Layer w0.5: OP3.7@27.076,16.866 cw(c29.159,16.866) 29.159,18.948 31.928,18.948 ccw(c31.928,21.488) 34.468,21.488 34.468,26.06
  Top Layer w0.7: OP3.7@27.127,16.688 27.135,16.68 OP3.7@27.135,16.625 ; OP3.7@27.153,16.586 ccw(c27.195,16.544) 27.135,16.544 27.135,13.568 ; R26.2@27.203,13.081 cw(c27.369,13.246) 27.135,13.246 27.135,13.547 ; R26.2@27.254,13.259 cw(c27.542,13.547) R26.2@27.149,13.44 ; R26.2@27.305,13.157 cw(c27.715,13.568) R26.2@27.149,13.44 ; 27.135,13.547 ccw(c27.542,13.547) R26.2@27.149,13.44 ; 27.135,13.547 27.135,13.568 ; 27.135,13.568 ccw(c27.715,13.568) R26.2@27.149,13.44
ADC-A3: OP4.1 R27.2 U1.1 | length 134.8
  Top Layer w0.35: 63.297,25.679 63.297,25.682 63.297,26.453 cw(c65.353,26.453) 63.348,26.908 cw(c65.353,26.453) 63.899,27.907 cw(c65.695,26.111) 65.695,28.651 111.605,28.651 cw(c111.605,26.682) 112.997,28.074 ccw(c114.793,29.87) 114.793,27.33 115.382,27.33 170.129,27.33 cw(c170.129,26.2) 171.26,26.2 ccw(c172.675,26.2) 172.675,24.785 180.659,24.785 180.67,24.795 ; 180.659,24.795 ccw(c180.659,26.311) 180.67,24.795 ; U1.1@182.175,27.491 182.175,26.311 cw(c180.659,26.311) 182.175,26.301 cw(c180.659,26.311) 180.67,24.795
  Top Layer w0.5: OP4.1@56.591,20.777 56.999,20.777 ; R27.2@59.919,23.647 60.808,23.647 ccw(c60.808,26.187) 63.297,25.682 ccw(c60.808,26.187) 63.348,26.187 63.348,26.908
  Top Layer w0.7: 56.999,20.777 R27.2@59.844,23.622
ADC-A4: OP4.7 R28.2 U1.2 | length 144.8
  Top Layer w0.35: 64.745,21.158 64.745,25.161 cw(c67.285,25.161) 65.288,26.731 ; 65.684,27.153 65.489,26.957 ccw(c67.285,25.161) 65.288,26.731 ; U1.2@182.963,27.491 182.963,26.499 cw(c180.645,26.499) 182.946,26.217 cw(c180.645,26.499) 180.927,24.198 cw(c180.645,26.499) 180.674,24.181 171.806,24.181 cw(c171.806,25.489) 170.498,25.489 ccw(c169.342,25.489) 169.342,26.645 114.91,26.645 113.981,26.645 cw(c113.981,29.185) 112.184,27.389 ccw(c111.098,26.303) 111.098,27.838 98.842,27.838 cw(c98.842,27.925) 98.781,27.864 67.473,27.864 ccw(c67.473,25.324) 65.677,27.12 65.288,26.731
  Top Layer w0.5: R28.2@55.103,12.629 R28.2@55.338,12.394 ; OP4.7@55.347,15.951 cw(c55.347,16.027) 55.307,15.963 cw(c55.347,16.027) 55.27,16.027 55.27,17.12 cw(c56.769,17.12) 56.769,18.618 62.205,18.618 ccw(c62.205,21.158) 64.745,21.158
  Top Layer w0.7: R28.2@55.103,12.908 55.103,15.759 55.307,15.963 OP4.7@55.321,15.977
ADC-A5: OP2.1 R23.2 U1.7 | length 108.4
  Top Layer w0.35: OP2.1@85.903,20.726 85.903,20.98 cw(c87.325,20.98) 87.325,22.403 ccw(c87.325,23.774) 88.697,23.774 R23.2@88.697,24.248 ; R23.2@88.849,24.308 89.705,25.164 cw(c91.502,23.368) 91.502,25.908 168.58,25.908 cw(c168.58,24.714) 169.774,24.714 ccw(c171.298,24.714) 171.298,23.19 184.785,23.19 186.713,25.119
  Top Layer w0.381: 186.713,25.119 186.951,25.357 U1.7@186.951,27.491
ADC-A6: OP2.7 R24.2 U1.9 | length 124.1
  Top Layer w0.35: 86.69,17.882 88.29,17.882 ccw(c88.29,20.422) 90.83,20.422 90.83,22.708 cw(c93.37,22.708) 93.37,25.248 ; 96.444,25.248 93.37,25.248 ; 188.551,24.083 cw(c187.054,24.083) 187.054,22.586 170.251,22.586 cw(c170.251,23.965) 168.872,23.965 ccw(c167.589,23.965) 167.589,25.248 93.37,25.248
  Top Layer w0.4: 188.551,24.083 U1.9@188.551,27.491
  Top Layer w0.5: OP2.7@84.557,15.773 ccw(c84.557,15.824) 84.607,15.824 84.607,16.224 84.607,17.272 cw(c85.293,17.272) 85.293,17.958 86.868,17.958
  Top Layer w0.7: OP2.7@84.582,16.18 cw(c84.633,16.18) 84.607,16.224 cw(c84.633,16.18) 84.633,16.231 cw(c84.633,16.053) 84.811,16.053 R24.2@84.811,12.379
DAC_0: R13.1 U1.8 | length 102.4
  Top Layer w0.254: v2@187.738,24.667 U1.8@187.738,27.491
  Top Layer w0.4: v1(252.247,59.766) 253.441,60.96 254.577,62.096 ccw(c252.781,63.892) 255.321,63.892 255.321,65.684
  Top Layer w0.5: R13.1@255.262,76.679 cw(c255.262,76.577) 255.364,76.577 v1(255.364,71.1) 255.364,63.424
  Bottom Layer w0.4: v2(187.453,24.509) 212.23,24.509 ccw(c212.23,27.049) 214.026,25.253 247.795,59.022 cw(c249.591,57.226) 249.591,59.766 v1(252.247,59.766)
DIG_OUT1: HC1.18 R9.9 TP1.1 | length 57.2
  Top Layer w0.35: 141.249,76.784 R9.9@142.113,75.921
  Top Layer w0.8: TP1.1@93.091,86.436 102.311,77.216 140.818,77.216 cw(c140.818,75.921) R9.9@142.113,75.921 ; HC1.18@142.004,73.508 142.004,75.761 R9.9@142.138,75.895
DIG_OUT2: HC1.17 R9.8 TP2.1 | length 44.6
  Top Layer w0.35: R9.8@144.653,75.921 R9.8@144.653,76.581
  Top Layer w0.8: TP2.1@107.594,86.462 114.681,79.375 142.113,79.375 cw(c142.113,76.835) 144.653,76.835 R9.8@144.653,76.581 ; HC1.17@144.544,73.508 144.544,75.735 R9.8@144.577,75.768
DIG_OUT3: HC1.16 R9.7 TP3.1 | length 33
  Top Layer w0.8: TP3.1@122.53,86.436 128.448,80.518 144.653,80.518 cw(c144.653,77.978) 147.193,77.978 R9.7@147.193,76.022 ; HC1.16@147.084,73.508 147.084,75.761 R9.7@147.218,75.895
DIG_OUT4: HC1.15 R9.6 TP5.1 | length 22.1
  Top Layer w0.8: TP5.1@137.084,86.436 141.656,81.864 147.422,81.864 cw(c147.422,79.553) 149.733,79.553 R9.6@149.733,75.921 149.733,75.844 ccw(c149.784,75.844) R9.6@149.784,75.794 ; HC1.15@149.624,73.508 149.624,75.938 R9.6@149.631,75.946
DIG_OUT5: HC1.14 R9.5 TP6.1 | length 12.9
  Top Layer w0.8: HC1.14@152.164,73.508 152.164,75.837 R9.5@152.171,75.844 ; TP6.1@152.197,86.487 152.273,86.411 R9.5@152.273,75.921
DIG_OUT6: HC1.13 R9.4 TP7.1 | length 19.4
  Top Layer w0.7: HC1.13@154.704,73.508 R9.4@154.704,75.837 ; R9.4@154.813,75.921 154.813,77.013 164.211,86.411 TP7.1@166.827,86.411
  Top Layer w0.8: R9.4@154.704,75.837 R9.4@154.788,75.921
DIG_OUT7: HC1.12 R9.3 TP8.1 | length 31.4
  Top Layer w0.8: R9.3@157.244,75.786 R9.3@157.378,75.921 ; R9.3@157.353,75.921 157.353,77.292 161.315,81.255 176.022,81.255 TP8.1@181.178,86.411
  Top Layer w1: HC1.12@157.244,73.508 R9.3@157.244,75.786
DIG_OUT8: HC1.11 R9.2 TP11.1 | length 43.6
  Top Layer w0.8: HC1.11@159.784,73.508 159.784,75.888 R9.2@159.791,75.895 ; R9.2@159.893,75.921 159.893,77.394 161.62,79.121 188.976,79.121 TP11.1@195.986,86.131
DIG_OUT9: HC2.18 R12.2 TP17.1 | length 51.7
  Top Layer w0.8: TP17.1@34.417,86.385 34.417,84.684 41.681,77.419 74.93,77.419 cw(c74.93,75.387) R12.2@76.962,75.387
  Top Layer w1: HC2.18@74.846,72.796 R12.2@76.886,75.413
DIG_OUT10: HC2.17 R12.3 TP20.1 | length 39.4
  Top Layer w0.8: TP20.1@49.098,86.436 49.098,86.157 56.363,78.892 76.962,78.892 cw(c76.962,76.352) 79.502,76.352 R12.3@79.502,75.387
  Top Layer w1: HC2.17@77.386,72.796 R12.3@79.527,75.286
DIG_OUT11: HC2.16 R12.4 TP22.1 | length 28.1
  Top Layer w0.8: TP22.1@63.729,86.639 70.18,80.188 79.502,80.188 cw(c79.502,77.648) 82.042,77.648 R12.4@82.042,75.387
  Top Layer w1: HC2.16@79.926,72.796 82.103,75.335 R12.4@82.169,75.413
DIG_OUT12: HC2.15 R12.5 TP25.1 | length 16.8
  Top Layer w0.8: TP25.1@78.715,86.385 84.582,80.518 R12.5@84.582,75.387
  Top Layer w1: HC2.15@82.466,72.796 R12.5@84.607,75.362
GND: C1.1 C2.2 C3.2 C4.1 C5.1 C6.2 C7.2 C8.1 C9.1 C10.1 C11.2 C12.1 C13.2 C14.1 C15.1 C16.1 C17.1 C18.1 C19.1 C20.1 C21.1 C22.1 C23.1 C24.2 C25.1 C26.1 C27.1 C28.1 C29.1 C30.1 C31.1 C32.2 C33.2 C34.1 C35.1 C36.1 C39.2 C41.2 C43.2 C_E1.1 C_E2.1 C_E3.1 C_E4.1 D2.1 D3.1 D4.1 D5.1 D6.1 D7.1 D8.1 D9.1 D10.1 D11.1 D12.1 D13.1 DZ2.1 FT1.7 FT1.18 FT1.21 FT1.25 FT1.26 HC1.9 HC2.9 L1.2 OP1.4 OP2.4 OP3.4 OP4.4 P1.3 POT1.3 Q1.2 Q2.2 Q3.2 R6.2 R11.1 R14.1 R29.1 R30.1 R31.1 R32.1 R33.1 R34.1 R41.1 R42.1 R43.1 R44.1 R45.1 R46.1 REF1.4 REG2.1 REG3.3 REG3.5 REG3.6 SW2.2 SW2.4 TP-GND.1 U1.14 U1.24 U1.34 U1.44 U1.52 U1.60 U2.10 U2.19 U3.8 U4.19 U5.8 U6.10 U6.19 USB1.4 USB1.5 | length 639.3
  Top Layer w0.3: SW2.4@81.759,36.431 SW2.2@88.759,36.431 ; REF1.4@104.212,17.551 105.783,17.551 ; 105.853,17.548 cw(c105.723,15.011) 108.259,15.142 ; POT1.3@108.263,12.421 108.263,15.071 ; FT1.26@136.862,40.095 138.799,40.095 ccw(c138.799,40.361) 139.065,40.361 139.065,41.377 ccw(c139.04,41.377) 139.04,41.402 ; FT1.25@136.862,40.745 138.687,40.745 ccw(c138.687,41.097) 139.04,41.097 139.04,41.402 ; FT1.21@136.862,43.345 138.855,43.345 ccw(c138.855,43.384) 138.894,43.384 ccw(c138.566,43.856) 139.04,43.53 ; FT1.18@136.862,45.295 138.703,45.295 ; P1.3@151.257,44.958 148.996,44.958 ccw(c148.996,43.84) 147.879,43.84 cw(c146.733,43.84) 146.733,42.695 FT1.7@144.112,42.695 142.09,42.695 cw(c142.09,44.094) 140.691,44.094 ccw(c139.49,44.094) 139.49,45.295 138.703,45.295 ; U1.60@179.813,33.054 185.258,33.054 v1@185.294,33.018 ; U1.52@179.813,39.429 185.227,39.429 185.294,39.495 ; 185.294,39.876 185.35,39.932 U1.44@185.35,44.205 ; 189.739,31.748 192.539,28.948 U1.14@192.539,27.491 ; 190.501,35.558 190.617,35.442 U1.24@196.501,35.442 ; 190.628,40.13 192.025,40.13 193.319,41.425 U1.34@193.319,43.383 ; 138.703,45.295 cw(c138.703,44.958) 139.04,44.958 139.04,43.53 ; 139.04,41.402 139.04,43.53
  Top Layer w0.35: v1(177.368,34.087) 178.401,33.054 U1.60@179.813,33.054
  Top Layer w0.4: v1(251.834,11.55) ccw(c251.834,12.344) 252.628,12.344 252.628,13.792 ccw(c251.968,13.792) U5.8@251.968,14.453
  Top Layer w0.7: v2@29.108,13.868 29.616,13.36 R32.1@29.616,12.963 ; 50.521,19.101 50.724,19.101 51.075,19.452 ; 52.197,20.93 52.197,20.904 ; 52.451,21.412 52.451,21.107 ; v2@56.617,13.716 57.277,13.056 R34.1@57.277,12.582 ; v2@86.639,13.335 86.868,13.106 R30.1@86.868,12.379 ; 116.942,68.25 117.254,68.562 119.042,68.562 120.142,67.462 U4.19@120.142,65.172 ; C33.2@124.401,37.448 C14.1@127.581,37.448 ; C14.1@127.511,37.448 C14.1@127.765,37.194 ; v1(131.945,11.67) 131.981,11.706 D5.1@131.981,12.954 ; v1(136.644,11.543) 136.68,11.579 136.68,12.954 ; v1@141.125,11.706 D7.1@141.125,12.954 ; v1@145.316,11.833 145.316,12.954 ; v1(149.344,11.797) 149.38,11.833 D3.1@149.38,12.954 ; v1(153.535,11.67) 153.825,11.96 D4.1@153.825,12.954 ; v1@157.762,11.888 v1(157.98,11.67) ; 185.928,67.742 185.953,67.767 187.935,67.767 187.952,67.749 U2.19@187.952,65.172 ; v1@205.751,11.459 D8.1@205.751,12.834 ; D9.1@210.099,12.915 210.099,11.611 v1(210.16,11.55) ; v1(214.732,11.804) 214.768,11.84 D11.1@214.768,12.961 ; v1(218.923,11.423) 218.959,11.459 D12.1@218.959,12.961 ; 219.786,66.777 220.32,67.31 222.301,67.31 ; 220.345,65.532 220.523,65.532 221.64,66.65 ; 220.485,66.684 220.519,66.65 220.929,66.65 ; 220.98,66.65 220.929,66.65 ; v1(223.876,11.55) 223.912,11.586 D13.1@223.912,12.961 ; U6.19@224.808,65.172 224.808,66.657 224.757,66.657 224.104,67.31 222.301,67.31 ; 51.075,19.452 51.075,19.731 52.197,20.853 ; 51.075,19.452 52.197,20.574 52.197,20.853 ; 52.197,20.853 52.222,20.879 ; 52.197,20.853 52.197,20.904 ; 52.197,20.904 52.222,20.879 ; 52.222,20.879 52.451,21.107 ; 52.222,20.879 52.324,20.777 OP4.4@52.781,20.777 52.451,21.107 ; 220.929,66.65 221.64,66.65 ; 221.64,66.65 222.301,67.31
  Top Layer w0.8: v1(54.203,55.779) 54.203,55.828 REG2.1@59.973,55.828
  Top Layer w1: REG3.6@17.475,52.248 REG3.3@24.859,52.248 ; REG3.6@17.831,55.499 cw(c18.19,55.14) 18.19,55.648 REG3.5@24.859,55.648 ; REG3.3@24.206,52.095 29.896,52.095 cw(c29.896,51.892) v1(30.099,51.892) ; USB1.4@114.957,42.982 121.178,42.982 cw(c121.178,41.275) C13.2@122.885,41.275 ; C13.2@123.571,41.42 125.519,41.42 ccw(c125.519,42.367) C26.1@126.467,42.367 ; v1(201.32,11.532) 201.32,13.106 cw(c201.346,13.106) D10.1@201.346,13.132 ; v1(205.715,11.423) D8.1@205.715,13.03 ; v1(210.16,11.55) 210.16,12.827 cw(c210.363,12.827) D9.1@210.363,13.03
  Top Layer w1.5: C11.2@16.133,69.164 16.133,52.168 ccw(c16.154,52.168) REG3.6@16.154,52.146 ; C11.2@16.154,69.088 16.154,82.855 TP-GND.1@19.914,86.614 ; REG3.5@24.663,55.651 cw(c24.74,55.651) 24.74,55.728 v1(30.099,55.728) ; C2.2@45.466,53.645 45.47,53.645 C2.2@45.47,53.467 C3.2@45.47,40.361
  Bottom Layer w0.35: C24.2@172.594,35.888 174.395,34.087 v1(177.368,34.087)
  Bottom Layer w0.4: 226.035,11.55 v1(251.834,11.55)
  Bottom Layer w0.7: v1@21.006,7.899 27.102,13.995 28.956,13.995 29.007,14.046 v2@29.007,13.995 ; v1@50.292,7.747 v1(50.317,7.772) 56.312,13.767 v2(56.667,13.767) ; v1@79.121,7.772 79.197,7.849 84.836,13.487 v2(86.462,13.487) ; v1@125.527,40.945 126.162,40.31 v1(126.162,37.465) ; v1(131.945,11.67) v1(141.089,11.67) v1(153.535,11.67) v1(157.98,11.67) ; 184.301,40.996 v1(186.437,38.86) ; v1(189.358,38.987) 189.358,47.143 194.056,51.841 v1(200.431,51.841) ; v1(197.231,11.659) 197.358,11.532 v1(201.32,11.532) ; v1@201.397,11.55 v1(210.16,11.55) v1(223.876,11.55) 226.035,11.55 ; v1(204.876,67.132) 208.534,70.79 v1(208.89,70.79) ; v1(210.617,81.813) 210.642,81.839 v1(216.129,81.839) ; v1(226.746,81.585) v1(232.385,81.585) ; v1(234.34,70.714) 238.125,66.929 v1(239.42,66.929)
  Bottom Layer w0.8: C4.1@36.203,51.649 43.692,51.649 ccw(c43.692,53.434) C2.2@45.476,53.434 ; C2.2@45.39,53.492 C2.2@45.417,53.52 ; C2.2@45.517,53.442 C2.2@45.476,53.434 ; v1(54.203,55.779) 48.874,55.779 ccw(c48.874,53.239) 47.078,55.035 C2.2@45.476,53.434
  Bottom Layer w1: v1@17.374,8.026 17.424,8.077 v1(21.107,8.077) ; v1@19.634,22.403 21.184,23.952 v1(28.778,23.952) ; v1@19.71,22.428 19.71,22.377 v1(21.768,20.32) ; v1(30.099,51.892) ccw(c30.099,51.841) 30.048,51.841 33.691,51.841 cw(c33.691,51.624) C5.1@33.909,51.624 C4.1@36.209,51.624 ; v1(33.655,8.077) 33.731,8.001 v1(40.107,8.001) ; R6.2@33.909,55.661 C12.1@33.909,57.709 ; v1@48.412,23.724 v1(57.963,23.724) ; v1@50.267,7.747 50.292,7.772 v1(50.317,7.772) v1(54.229,7.772) ; v1(65.43,8.28) v1(70.587,8.28) ; v1(77.419,23.368) v1(86.233,23.368) ; v1(79.172,7.849) 79.197,7.849 v1(83.16,7.849) ; HC2.9@95.021,65.176 95.047,65.202 v1(114.351,65.202) ; v3@106.68,47.701 106.731,47.752 USB1.5@114.452,47.752 ; POT1.3@108.077,12.421 109.848,10.65 ccw(c111.644,12.446) 111.644,9.906 118.633,9.906 ccw(c118.633,12.446) 120.429,10.65 120.853,11.074 cw(c122.29,9.638) 122.29,11.67 v1(131.945,11.67) ; USB1.5@114.224,47.752 USB1.5@114.452,47.752 ; USB1.5@114.452,47.93 cw(c114.452,47.425) USB1.5@114.837,47.752 ; USB1.4@114.957,42.982 114.957,47.425 ccw(c114.452,47.425) USB1.5@114.837,47.752 ; P1.3@151.257,44.958 158.878,44.958 cw(c158.878,42.418) 161.418,42.418 ; C24.2@172.594,35.888 171.321,35.888 C25.1@169.927,34.493 C1.1@168.022,34.493 C10.1@166.117,34.493 C31.1@164.212,34.493 163.193,34.493 C32.2@161.418,36.269 161.418,42.418 ; v1(182.956,47.32) v1(182.956,53.848) ; v1(241.503,81.356) v1(246.329,81.356) ; v1@249.479,81.407 v1(253.34,81.407) ; USB1.5@114.452,47.752 USB1.5@114.837,47.752 ; USB1.5@114.837,47.752 158.878,47.752 cw(c158.878,45.212) 161.418,45.212 161.418,42.418
  Bottom Layer w1.5: v1(30.099,55.728) ccw(c30.166,55.728) 30.166,55.661 R6.2@33.909,55.661
  other v1: 17.348,7.925 145.28,11.797 19.634,22.504 47.981,23.647 185.802,33.272 187.453,33.272 189.104,33.272 190.628,33.272 185.167,34.796 186.691,34.796 188.342,34.796 189.866,34.796 187.834,36.193 189.358,36.32 190.755,36.32 186.183,36.447 187.072,37.59 188.596,37.59 190.12,37.59 185.675,37.717 187.961,38.987 190.882,38.987 125.578,40.945 249.428,81.432
  other v2: 29.058,13.868
  other v3: 106.731,47.777
INPUT_DIG1: D2.3 R20.5 TP9.1 U3.3 | length 71.2
  Top Layer w0.35: R20.5@144.018,18.248 148.071,22.301 161.798,22.301
  Top Layer w0.5: TP9.1@137.084,3.327 141.529,3.327 ccw(c141.529,5.867) 144.069,5.867 144.069,13.697 cw(c146.304,13.697) D2.3@146.304,15.932 cw(c146.304,18.193) 144.043,18.193 R20.5@144.043,18.237 ; 161.798,22.301 162.331,22.301 cw(c162.331,19.761) 164.871,19.761 164.871,12.827 ccw(c167.411,12.827) 167.411,10.287 177.419,10.287 ccw(c177.419,11.367) 177.646,10.311 ccw(c177.419,11.367) 178.474,11.139 ccw(c177.419,11.367) 178.499,11.367 U3.3@178.499,12.563
INPUT_DIG2: D3.3 R20.6 TP10.1 U3.5 | length 66
  Top Layer w0.35: R20.6@146.558,18.248 146.572,18.263 149.671,21.361 160.122,21.361
  Top Layer w0.5: R20.6@146.558,18.263 146.572,18.263 146.66,18.263 cw(c146.66,17.196) 147.726,17.196 ccw(c149.269,17.196) 149.269,15.653 D3.3@150.317,15.653 cw(c150.317,13.596) 152.375,13.596 TP10.1@152.375,3.962 ; 160.122,21.361 161.366,21.361 cw(c161.366,18.821) 163.906,18.821 163.906,12.014 ccw(c166.446,12.014) 166.446,9.474 179.451,9.474 ccw(c179.451,11.062) 181.039,11.062 U3.5@181.039,12.563